# Altium PCB VRAM SIMM TC5262x7J v1.0_PCB_Altium.pcbdoc
Units mm, origin at the board's own origin, x right, y up, seen from the top; angles counter-clockwise.
Board outline 128.52 x 48.51 mm, 2 copper layers (Top Layer, Bottom Layer); 5 components, 55 nets, 290 pads, 63 vias.
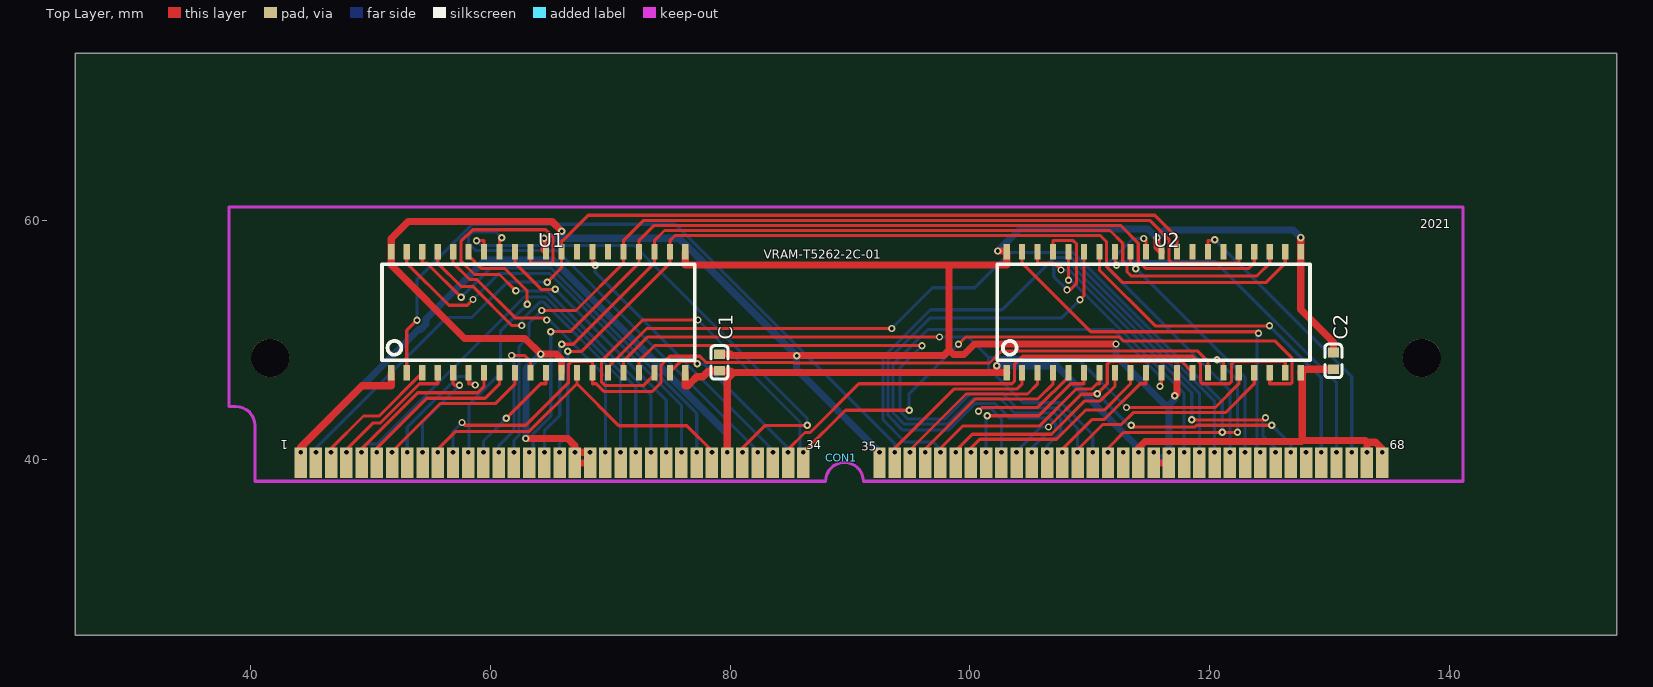
[diagram p0: Top Layer view]
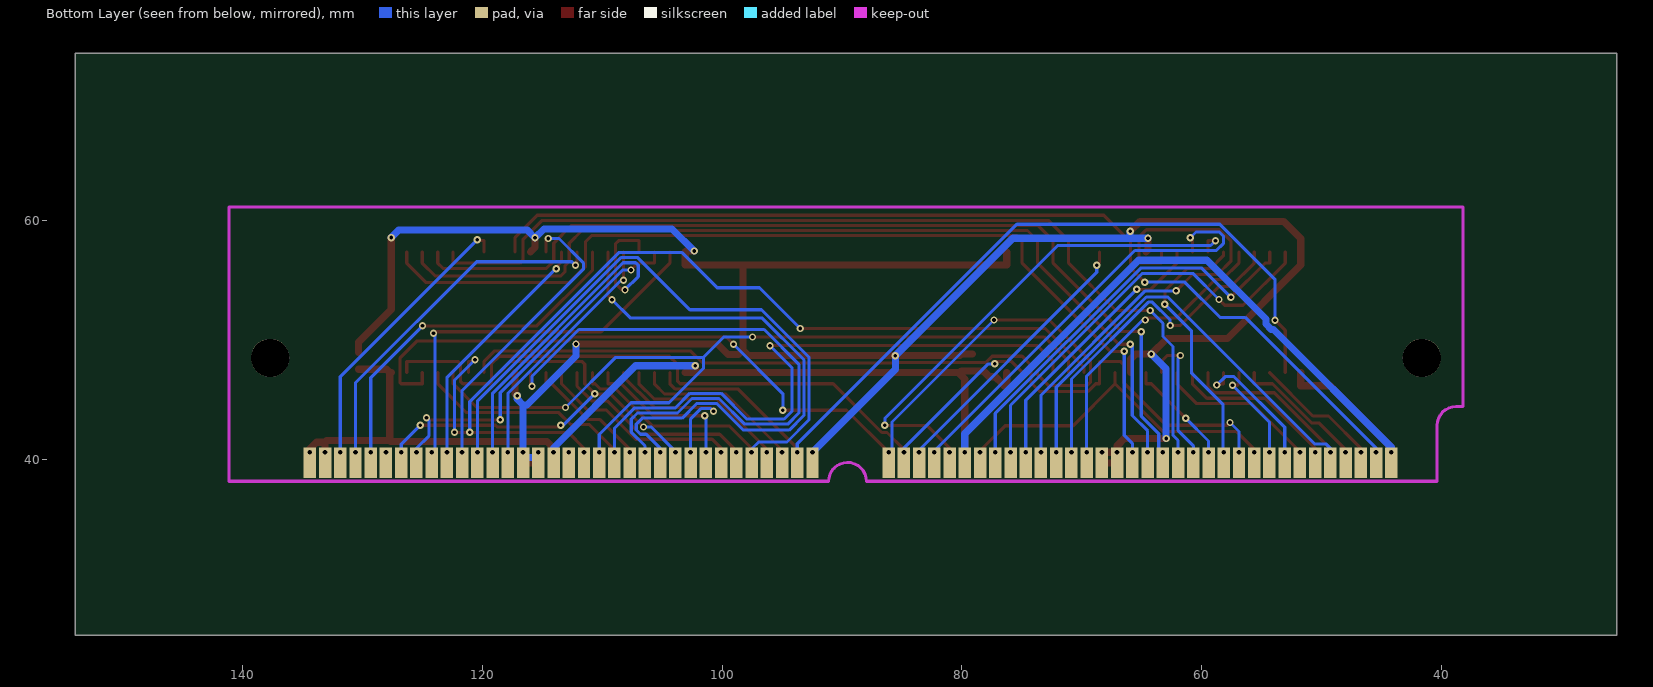
[diagram p1: Bottom Layer view, seen from below]

## Layer stack, top to bottom
Top Layer: signal copper (thickness not stored)
Dielectric: dielectric 0.32, FR-4, Dk 4.8
Bottom Layer: signal copper (thickness not stored)

## Board outline
153.924,25.4 25.4,25.4 25.4,73.914 153.924,73.914

## Components (designator, comment, footprint, x,y, rotation, side; value= is the part's Value field where it differs from the comment)
C1 "1uF" C0603 79.121,48.133 r90 top
C2 "1uF" C0603 130.302,48.26 r90 top
CON1 "SIMM68" SIMM68R 43.688,38.481 r0 top
U1 "TC528267J" SOJ40 64.008,52.451 r0 top
U2 "TC528267J" SOJ40 115.316,52.451 r0 top

## Footprints (in the part's own frame and the unit in brackets; to place one, negate y for a bottom-side part, rotate by r counter-clockwise, add the part's x,y. Pads: shape width x height; smd on the part's side, far side on the other; paste and mask are expansions set on the pad)
C0603 [mm]
  rect 0.8x0.9 smd: 1(-0.7,0) 2(0.7,0)
  silkscreen extent -1.4,-0.7 1.4,0.72
SIMM68R [mil]
  rect 40.94x100 smd: 1(20,50) 2(70,50) 3(120,50) 4(170,50) 5(220,50) 6(270,50) 7(320,50) 8(370,50) 9(420,50) 10(470,50) 11(520,50) 12(570,50) 13(620,50) 14(670,50) 15(720,50) 16(770,50) 17(820,50) 18(870,50) 19(920,50) 20(970,50) 21(1020,50) 22(1070,50) 23(1120,50) 24(1170,50) 25(1220,50) 26(1270,50) 27(1320,50) 28(1370,50) 29(1420,50) 30(1470,50) 31(1520,50) 32(1570,50) 33(1620,50) 34(1670,50) 35(1920,50) 36(1970,50) 37(2020,50) 38(2070,50) 39(2120,50) 40(2170,50) 41(2220,50) 42(2270,50) 43(2320,50) 44(2370,50) 45(2420,50) 46(2470,50) 47(2520,50) 48(2570,50) 49(2620,50) 50(2670,50) 51(2720,50) 52(2770,50) 53(2820,50) 54(2870,50) 55(2920,50) 56(2970,50) 57(3020,50) 58(3070,50) 59(3120,50) 60(3170,50) 61(3220,50) 62(3270,50) 63(3320,50) 64(3370,50) 65(3420,50) 66(3470,50) 67(3520,50) 68(3570,50)
  rect 40.94x100 smd far side: 1(20,50) 2(70,50) 3(120,50) 4(170,50) 5(220,50) 6(270,50) 7(320,50) 8(370,50) 9(420,50) 10(470,50) 11(520,50) 12(570,50) 13(620,50) 14(670,50) 15(720,50) 16(770,50) 17(820,50) 18(870,50) 19(920,50) 20(970,50) 21(1020,50) 22(1070,50) 23(1120,50) 24(1170,50) 25(1220,50) 26(1270,50) 27(1320,50) 28(1370,50) 29(1420,50) 30(1470,50) 31(1520,50) 32(1570,50) 33(1620,50) 34(1670,50) 35(1920,50) 36(1970,50) 37(2020,50) 38(2070,50) 39(2120,50) 40(2170,50) 41(2220,50) 42(2270,50) 43(2320,50) 44(2370,50) 45(2420,50) 46(2470,50) 47(2520,50) 48(2570,50) 49(2620,50) 50(2670,50) 51(2720,50) 52(2770,50) 53(2820,50) 54(2870,50) 55(2920,50) 56(2970,50) 57(3020,50) 58(3070,50) 59(3120,50) 60(3170,50) 61(3220,50) 62(3270,50) 63(3320,50) 64(3370,50) 65(3420,50) 66(3470,50) 67(3520,50) 68(3570,50)
  round 19.68 hole 15.75: 1(20,85) 2(70,85) 3(120,85) 4(170,85) 5(220,85) 6(270,85) 7(320,85) 8(370,85) 9(420,85) 10(470,85) 11(520,85) 12(570,85) 13(620,85) 14(670,85) 15(720,85) 16(770,85) 17(820,85) 18(870,85) 19(920,85) 20(970,85) 21(1020,85) 22(1070,85) 23(1120,85) 24(1170,85) 25(1220,85) 26(1270,85) 27(1320,85) 28(1370,85) 29(1420,85) 30(1470,85) 31(1520,85) 32(1570,85) 33(1620,85) 34(1670,85) 35(1920,85) 36(1970,85) 37(2020,85) 38(2070,85) 39(2120,85) 40(2170,85) 41(2220,85) 42(2270,85) 43(2320,85) 44(2370,85) 45(2420,85) 46(2470,85) 47(2520,85) 48(2570,85) 49(2620,85) 50(2670,85) 51(2720,85) 52(2770,85) 53(2820,85) 54(2870,85) 55(2920,85) 56(2970,85) 57(3020,85) 58(3070,85) 59(3120,85) 60(3170,85) 61(3220,85) 62(3270,85) 63(3320,85) 64(3370,85) 65(3420,85) 66(3470,85) 67(3520,85) 68(3570,85)
SOJ40 [mil]
  rect 20.3x50.8 smd: 1(-482.6,-203.2) 2(-431.8,-203.2) 3(-381,-203.2) 4(-330.2,-203.2) 5(-279.4,-203.2) 6(-228.6,-203.2) 7(-177.8,-203.2) 8(-127,-203.2) 9(-76.2,-203.2) 10(-25.4,-203.2) 11(25.4,-203.2) 12(76.2,-203.2) 13(127,-203.2) 14(177.8,-203.2) 15(228.6,-203.2) 16(279.4,-203.2) 17(330.2,-203.2) 18(381,-203.2) 19(431.8,-203.2) 20(482.6,-203.2) 21(482.6,193) 22(431.8,193) 23(381,193) 24(330.2,193) 25(279.4,193) 26(228.6,193) 27(177.8,193) 28(127,193) 29(76.2,193) 30(25.4,193) 31(-25.4,193) 32(-76.2,193) 33(-127,193) 34(-177.8,193) 35(-228.6,193) 36(-279.4,193) 37(-330.2,193) 38(-381,193) 39(-431.8,193) 40(-482.6,193)
  silkscreen extent -513,-163 513,152

## Free pads (board coordinates)
  round 3.18 hole 3.18 unplated: ""(41.656,48.514) ""(137.668,48.514)

## Via types
v1: diameter 0.61, hole 0.31, Top Layer to Bottom Layer, 63 vias

## Nets (pads, with @x,y where several pads share a name; then routed paths per layer and width w, separated by ;. In a path a pad name is that pad's centre, name@x,y a point inside that pad or via, vN(x,y) a via of type N, cw(c..) or ccw(c..) an arc to the next point about the centre after c; other vN are vias at no path point)
/CAS_A: CON1.32 U1.27 | length 24.8
  Top Layer w0.26: U1.27 68.524,56.416 68.572,56.416 v1(68.758,56.231) ; CON1.32@83.566,39.751 CON1.32@83.566,40.64
  Bottom Layer w0.26: v1(68.758,56.231) 68.758,55.644 83.566,40.836 83.566,40.64 CON1.32@83.566,39.751
/CAS_B: CON1.66 U2.27 | length 25.8
  Top Layer w0.26: U2.27 119.832,58.29 120.32,58.29 v1(120.399,58.369) ; CON1.66@131.826,39.751 CON1.66@131.826,40.64
  Bottom Layer w0.26: v1(120.399,58.369) 131.826,46.942 131.826,40.64 CON1.66@131.826,39.751
/DT/OE_1: CON1.5 CON1.23 U1.7 | length 54.3
  Top Layer w0.26: CON1.5@49.276,39.751 49.276,40.64 49.276,40.924 53.957,45.606 58.958,45.606 59.492,46.139 59.492,46.352 59.492,47.175 U1.7 ; CON1.23@72.136,39.751 CON1.23@72.136,40.64
  Bottom Layer w0.26: CON1.5@49.276,39.751 49.276,40.64 49.276,40.978 49.614,41.318 50.561,41.318 62.832,53.589 64.623,53.589 72.136,46.076 72.136,40.64 CON1.23@72.136,39.751
/DT/OE_3: CON1.39 CON1.57 U2.7 | length 71.9
  Top Layer w0.26: CON1.39@97.536,39.751 97.536,40.64 97.536,40.978 99.38,42.822 105.778,42.822 108.885,45.928 110.17,45.928 110.592,46.352 110.8,46.352 U2.7 ; CON1.57@120.396,39.751 CON1.57@120.396,40.64
  Bottom Layer w0.26: CON1.39@97.536,39.751 97.536,40.64 97.536,40.914 96.944,41.506 94.585,41.506 92.743,43.345 92.743,48.565 96.703,52.525 102.682,52.525 107.023,56.868 108.433,56.868 120.396,44.902 120.396,40.64 CON1.57@120.396,39.751
/RAS: CON1.11 U1.14 U2.14 | length 76.1
  Top Layer w0.26: CON1.11@56.896,39.751 CON1.11@56.896,40.64 ; v1(57.648,43.122) 57.876,42.893 62.956,42.893 66.535,46.474 66.535,47.968 66.794,48.227 68.524,48.227 U1.14 68.524,46.926 68.524,46.352 68.837,46.352 69.472,45.717 73.525,45.717 74.237,46.429 74.237,47.909 74.976,48.651 77.475,48.651 77.998,48.125 85.263,48.125 85.301,48.087 101.623,48.087 102.608,49.073 118.986,49.073 119.832,48.227 U2.14
  Bottom Layer w0.26: CON1.11@56.896,39.751 56.896,40.64 56.896,42.37 v1(57.648,43.122)
/SE_A: CON1.12 U1.35 | length 23.7
  Top Layer w0.26: CON1.12@58.166,39.751 CON1.12@58.166,40.64 ; U1.35 58.202,57.028 59.266,55.964 61.206,55.964 63.081,54.092 v1(63.081,52.992)
  Bottom Layer w0.26: CON1.12@58.166,39.751 58.166,40.64 58.245,40.719 58.245,44.648 60.863,47.264 60.863,50.775 v1(63.081,52.992)
/SE_B: CON1.45 U2.35 | length 48.2
  Top Layer w0.26: CON1.45@105.156,39.751 CON1.45@105.156,40.64 ; v1(109.169,53.365) 109.51,53.706 U2.35
  Bottom Layer w0.26: CON1.45@105.156,39.751 105.156,40.64 105.156,40.978 106.329,42.149 106.797,42.149 107.147,42.499 107.147,42.995 106.647,43.495 103.325,43.495 102.113,44.707 100.424,44.707 98.201,42.487 94.399,42.487 93.167,43.718 93.167,48.346 96.675,51.854 107.658,51.854 v1(109.169,53.365)
/WB/WE_2: CON1.10 CON1.28 U1.13 | length 32.3
  Top Layer w0.26: CON1.10@55.626,39.751 55.626,40.64 55.626,40.881 57.13,42.385 63.266,42.385 67.234,46.352 ; U1.13 67.234,46.352 ; CON1.28@78.486,39.751 78.486,40.64 78.486,40.77 76.396,42.86 70.726,42.86 67.234,46.352
  Bottom Layer w0.26: CON1.10@55.626,39.751 CON1.10@55.626,40.64 ; CON1.28@78.486,39.751 CON1.28@78.486,40.64
/WB/WE_4: CON1.44 CON1.62 U2.13 | length 41.5
  Top Layer w0.26: CON1.44@103.886,39.751 CON1.44@103.886,40.64 ; v1(106.548,42.748) 109.281,45.481 110.566,45.481 v1(110.612,45.527) 111.445,46.36 111.445,47.988 111.686,48.227 117.632,48.227 118.542,47.318 U2.13 ; v1(113.444,42.901) 113.591,42.751 118.74,42.751 118.887,42.901 v1(125.166,42.901) ; CON1.62@126.746,39.751 CON1.62@126.746,40.64
  Bottom Layer w0.26: CON1.44@103.886,39.751 103.886,40.64 103.886,40.742 105.893,42.748 v1(106.548,42.748) ; v1(110.612,45.527) 113.238,42.901 v1(113.444,42.901) ; v1(125.166,42.901) 126.746,41.321 126.746,40.64 CON1.62@126.746,39.751
A0: CON1.15 U1.25 U2.25 | length 80.3
  Top Layer w0.26: CON1.15@61.976,39.751 CON1.15@61.976,40.64 ; v1(64.305,52.464) 67.155,52.464 71.105,56.416 U1.25 71.105,57.821 71.105,58.29 72.796,59.982 114.991,59.982 116.606,58.367 116.606,56.642 116.832,56.416 122.413,56.416 U2.25
  Bottom Layer w0.26: CON1.15@61.976,39.751 61.976,40.64 61.976,41.638 62.4,42.06 62.4,49.464 63.233,50.297 63.233,51.394 v1(64.305,52.464)
A1: CON1.16 U1.24 U2.24 | length 79.5
  Top Layer w0.26: CON1.16@63.246,39.751 CON1.16@63.246,40.64 ; v1(65.047,50.698) 66.678,50.698 72.395,56.416 U1.24 72.395,58.29 73.665,59.56 112.545,59.56 114.026,58.077 114.026,56.584 114.63,55.979 123.266,55.979 123.703,56.416 U2.24
  Bottom Layer w0.26: CON1.16@63.246,39.751 63.246,40.64 63.584,40.978 63.584,42.197 65.047,43.66 v1(65.047,50.698)
A2: CON1.17 U1.23 U2.23 | length 79.6
  Top Layer w0.26: CON1.17@64.516,39.751 CON1.17@64.516,40.64 ; v1(65.969,49.654) 66.924,49.654 73.685,56.416 U1.23 73.685,58.29 74.531,59.136 111.674,59.136 112.735,58.075 112.735,56.553 113.093,56.195 113.093,55.687 113.441,55.336 123.914,55.336 124.993,56.416 U2.23
  Bottom Layer w0.26: CON1.17@64.516,39.751 64.516,40.64 64.516,42.431 65.794,43.708 65.794,49.482 v1(65.969,49.654)
A3: CON1.18 U1.22 U2.22 | length 79.8
  Top Layer w0.26: CON1.18@65.786,39.751 CON1.18@65.786,40.64 ; v1(66.462,49.055) 67.617,49.055 74.976,56.416 U1.22 74.976,58.29 75.4,58.715 110.871,58.715 111.369,58.214 111.369,56.147 112.723,54.79 124.661,54.79 126.284,56.416 U2.22
  Bottom Layer w0.26: CON1.18@65.786,39.751 65.786,40.64 65.786,41.382 66.462,42.057 v1(66.462,49.055)
A4: CON1.33 U1.19 U2.19 | length 65.5
  Top Layer w0.26: U1.19 74.976,47.318 75.885,48.227 77.053,48.227 v1(77.262,48.019) ; CON1.33@84.836,39.751 84.836,40.64 84.836,40.891 86.238,42.294 86.675,42.294 90.734,46.352 103.502,46.352 103.703,46.553 103.703,47.96 104.391,48.651 118.582,48.651 119.225,48.009 119.225,46.487 119.357,46.352 121.608,46.352 121.813,46.558 121.813,48.009 122.034,48.227 126.284,48.227 U2.19
  Bottom Layer w0.26: v1(77.262,48.019) 77.795,48.019 84.836,40.978 84.836,40.64 CON1.33@84.836,39.751
A5: CON1.34 U1.18 U2.18 | length 83.9
  Top Layer w0.26: U1.18 73.685,47.099 72.812,46.225 69.56,46.225 69.263,46.523 69.263,48.227 72.71,51.671 v1(77.32,51.671) ; CON1.34@86.106,39.751 86.106,40.64 89.619,44.15 v1(94.925,44.15) ; v1(99.047,49.652) 99.662,50.269 112.418,50.269 112.753,49.934 125.418,49.934 126.835,48.517 126.835,46.429 126.759,46.352 124.993,46.352 U2.18
  Bottom Layer w0.26: v1(77.32,51.671) 85.829,43.162 85.829,40.917 86.106,40.64 CON1.34@86.106,39.751 ; v1(94.925,44.15) 94.925,45.529 v1(99.047,49.652)
A6: CON1.48 U1.17 U2.17 | length 70.4
  Top Layer w0.26: U1.17 72.395,48.227 73.698,49.53 v1(95.994,49.53) ; CON1.48@108.966,39.751 108.966,40.64 108.966,40.864 111.064,42.962 112.616,42.962 113.602,43.947 121.298,43.947 123.703,46.352 123.703,46.82 U2.17
  Bottom Layer w0.26: v1(95.994,49.53) 94.165,47.701 94.165,44.066 94.816,43.414 97.935,43.414 100.073,45.552 102.674,45.552 103.881,44.346 107.277,44.346 108.966,42.657 108.966,40.64 CON1.48@108.966,39.751
A7: CON1.49 U1.16 U2.16 | length 72.4
  Top Layer w0.26: U1.16 71.105,48.227 73.139,50.262 v1(97.457,50.262) ; CON1.49@110.236,39.751 CON1.49@110.236,40.64 ; v1(113.05,44.374) 120.434,44.374 122.413,46.352 U2.16
  Bottom Layer w0.26: v1(97.457,50.262) 99.835,50.262 101.539,48.56 ; CON1.49@110.236,39.751 110.236,40.64 110.236,42.121 107.587,44.77 104.419,44.77 101.539,47.65 101.539,48.56 ; v1(113.05,44.374) 108.864,48.56 101.539,48.56
A8: CON1.50 U1.15 U2.15 | length 85.1
  Top Layer w0.26: U1.15 69.814,47.734 73.048,50.968 v1(93.475,50.968) ; CON1.50@111.506,39.751 111.506,40.64 111.506,40.978 112.832,42.304 v1(121.031,42.304) v1(122.301,42.304) ; v1(120.594,48.362) 120.729,48.227 121.122,48.227 U2.15
  Bottom Layer w0.26: v1(93.475,50.968) 96.868,54.364 100.393,54.364 103.322,57.29 108.608,57.29 121.031,44.867 v1(121.031,42.304) ; CON1.50@111.506,39.751 CON1.50@111.506,40.64 ; v1(120.594,48.362) 122.301,46.655 v1(122.301,42.304)
DSF: CON1.2 U1.29 U2.29 | length 85.3
  Top Layer w0.26: CON1.2@45.466,39.751 CON1.2@45.466,40.64 ; v1(64.747,54.828) 65.943,56.025 U1.29 65.943,57.729 65.943,58.29 66.05,58.29 68.163,60.406 115.413,60.406 117.251,58.565 117.251,58.29 U2.29
  Bottom Layer w0.26: CON1.2@45.466,39.751 45.466,40.64 45.466,40.978 56.383,51.895 58.486,51.895 61.42,54.828 v1(64.747,54.828)
GND: C1.2 C2.2 CON1.19 CON1.20 CON1.35 CON1.53 CON1.54 U1.12 U1.21 U1.30 U1.40 U2.12 U2.21 U2.30 U2.40 | length 222
  Top Layer w0.6: v1(62.972,41.786) 66.464,41.786 67.056,41.194 67.056,40.64 68.326,40.64 68.326,39.751 CON1.19@67.056,39.751 ; v1(64.483,58.481) 64.483,57.523 U1.30 ; U1.12 65.943,47.843 65.943,48.395 65.509,48.829 v1(64.206,48.829) 62.903,50.132 57.864,50.132 51.75,56.248 51.75,56.799 U1.40 51.75,58.458 53.188,59.896 65.138,59.896 v1(65.974,59.06) ; U1.21 76.266,56.248 98.257,56.248 ; C1.2 80.03,48.834 80.147,48.717 v1@85.547,48.717 ; v1(85.547,48.684) v1@85.547,48.717 ; CON1.35@92.456,39.751 CON1.35@92.456,40.64 ; v1(102.314,57.417) 102.994,57.417 U2.40 103.058,56.248 98.257,56.248 ; v1(112.171,49.67) 100.378,49.67 99.499,48.791 98.626,48.791 98.257,49.162 ; CON1.53@115.316,39.751 116.586,39.751 CON1.54@116.586,40.64 ; v1(115.59,58.519) 115.59,57.724 U2.30 ; v1(117.079,45.352) 117.251,45.527 U2.12 ; v1(127.574,58.542) U2.21 127.574,52.548 130.302,49.82 C2.2 ; v1@85.547,48.717 97.813,48.717 98.257,49.162 ; 98.257,49.162 98.257,56.248
  Bottom Layer w0.6: v1(62.972,41.786) 62.992,41.806 62.992,47.615 v1(64.206,48.829) ; v1(64.483,58.481) 65.974,58.481 ; v1(65.974,59.06) 65.974,58.481 ; CON1.19@67.056,39.751 CON1.19@67.056,40.64 ; CON1.20@68.326,39.751 CON1.20@68.326,40.64 ; CON1.35@92.456,39.751 92.456,40.64 85.547,47.549 v1(85.547,48.684) 75.75,58.481 65.974,58.481 ; v1(102.314,57.417) 104.163,59.263 114.844,59.263 v1(115.59,58.519) 116.238,59.167 126.949,59.167 v1(127.574,58.542) ; v1(112.171,49.67) 112.171,48.664 116.251,44.582 116.586,44.582 ; CON1.53@115.316,39.751 CON1.53@115.316,40.195 ; CON1.53@115.316,40.64 CON1.53@115.316,40.195 ; CON1.54@116.586,39.751 CON1.54@116.586,40.195 ; v1(117.079,45.352) 117.079,45.075 116.586,44.582 ; CON1.53@115.316,40.195 CON1.54@116.586,40.195 ; CON1.54@116.586,40.195 116.586,40.64 116.586,44.582
I/O1_A: CON1.6 U1.8 | length 15.5
  Top Layer w0.26: CON1.6@50.546,39.751 50.546,40.64 50.546,40.988 54.704,45.148 59.578,45.148 60.782,46.352 U1.8
  Bottom Layer w0.26: CON1.6@50.546,39.751 CON1.6@50.546,40.64
I/O1_B: CON1.40 U2.8 | length 18.5
  Top Layer w0.26: CON1.40@98.806,39.751 98.806,40.64 98.806,40.757 100.198,42.149 106.797,42.149 109.576,44.93 110.861,44.93 112.09,46.159 112.09,46.352 U2.8
  Bottom Layer w0.26: CON1.40@98.806,39.751 CON1.40@98.806,40.64
I/O2_A: CON1.7 U1.9 | length 15.4
  Top Layer w0.26: CON1.7@51.816,39.751 51.816,40.64 51.816,40.698 55.816,44.696 60.419,44.696 62.073,46.352 U1.9
  Bottom Layer w0.26: CON1.7@51.816,39.751 CON1.7@51.816,40.64
I/O2_B: CON1.41 U2.9 | length 18.6
  Top Layer w0.26: CON1.41@100.076,39.751 100.076,40.64 100.076,40.978 100.825,41.727 107.206,41.727 109.634,44.158 111.186,44.158 113.381,46.352 U2.9
  Bottom Layer w0.26: CON1.41@100.076,39.751 CON1.41@100.076,40.64
I/O3_A: CON1.14 U1.10 | length 13.2
  Top Layer w0.26: CON1.14@60.706,39.751 CON1.14@60.706,40.64 ; v1(61.783,48.71) 62.88,48.71 63.363,48.227 U1.10
  Bottom Layer w0.26: CON1.14@60.706,39.751 60.706,40.64 60.706,41.176 61.976,42.446 61.976,48.517 v1(61.783,48.71)
I/O3_B: CON1.47 U2.10 | length 12.2
  Top Layer w0.26: CON1.47@107.696,39.751 107.696,40.64 107.696,40.884 110.198,43.386 111.216,43.386 114.183,46.352 114.671,46.352 U2.10
  Bottom Layer w0.26: CON1.47@107.696,39.751 CON1.47@107.696,40.64
I/O4_A: CON1.13 U1.11 | length 10.9
  Top Layer w0.26: CON1.13@59.436,39.751 CON1.13@59.436,40.64 ; v1(61.341,43.49) 64.204,46.352 64.653,46.352 U1.11
  Bottom Layer w0.26: CON1.13@59.436,39.751 59.436,40.64 59.436,41.585 v1(61.341,43.49)
I/O4_B: CON1.46 U2.11 | length 52.1
  Top Layer w0.26: CON1.46@106.426,39.751 CON1.46@106.426,40.64 ; v1(115.839,46.159) 115.961,46.284 U2.11
  Bottom Layer w0.26: CON1.46@106.426,39.751 106.426,40.64 106.426,41.181 107.569,42.324 107.569,43.404 107.051,43.922 103.708,43.922 102.499,45.131 100.249,45.131 98.108,42.989 94.513,42.989 93.589,43.914 93.589,47.97 96.492,50.874 111.935,50.874 115.839,46.97 v1(115.839,46.159)
I/O5_A: CON1.24 U1.31 | length 41.9
  Top Layer w0.26: v1(62.141,54.105) 60.777,55.469 58.689,55.469 57.556,56.601 57.556,58.224 58.529,59.197 64.615,59.197 65.245,58.565 65.245,56.589 65.072,56.416 63.363,56.416 U1.31 ; CON1.24@73.406,39.751 CON1.24@73.406,40.64
  Bottom Layer w0.26: v1(62.141,54.105) 64.706,54.105 73.406,45.405 73.406,40.64 CON1.24@73.406,39.751
I/O5_B: CON1.58 U2.31 | length 26.7
  Top Layer w0.26: v1(114.485,58.471) 114.666,58.29 114.671,58.29 U2.31 ; CON1.58@121.666,39.751 CON1.58@121.666,40.64
  Bottom Layer w0.26: v1(114.485,58.471) 113.594,58.471 111.557,56.434 111.557,55.898 121.666,45.789 121.666,40.64 CON1.58@121.666,39.751
I/O6_A: CON1.25 U1.32 | length 24.4
  Top Layer w0.26: U1.32 62.073,56.416 64.282,54.206 65.377,54.206 v1(65.413,54.244) ; CON1.25@74.676,39.751 CON1.25@74.676,40.64
  Bottom Layer w0.26: v1(65.413,54.244) 74.676,44.981 74.676,40.64 CON1.25@74.676,39.751
I/O6_B: CON1.59 U2.32 | length 22.5
  Top Layer w0.26: U2.32 113.381,56.505 113.815,56.073 v1(113.815,55.933) ; CON1.59@122.936,39.751 CON1.59@122.936,40.64
  Bottom Layer w0.26: v1(113.815,55.933) 113.868,55.933 122.936,46.866 122.936,40.64 CON1.59@122.936,39.751
I/O7_A: CON1.31 U1.33 | length 38.1
  Top Layer w0.26: U1.33 60.782,58.29 60.96,58.468 v1(60.96,58.534) ; CON1.31@82.296,39.751 CON1.31@82.296,40.64
  Bottom Layer w0.26: v1(60.96,58.534) 60.485,59.009 58.532,59.009 58.199,58.677 58.199,58.042 58.781,57.462 65.583,57.462 82.296,40.749 82.296,40.64 CON1.31@82.296,39.751
I/O7_B: CON1.65 U2.33 | length 31.4
  Top Layer w0.26: U2.33 112.09,56.416 112.215,56.291 v1(112.215,56.228) ; CON1.65@130.556,39.751 CON1.65@130.556,40.64
  Bottom Layer w0.26: v1(112.215,56.228) 112.519,56.533 120.459,56.533 130.556,46.436 130.556,40.64 CON1.65@130.556,39.751
I/O8_A: CON1.30 U1.34 | length 44.2
  Top Layer w0.26: v1(58.859,58.29) 59.492,58.29 U1.34 ; CON1.30@81.026,39.751 81.026,40.64 81.026,40.978 82.939,42.89 v1(86.426,42.89)
  Bottom Layer w0.26: v1(58.859,58.29) 59.266,57.884 72.004,57.884 86.426,43.462 v1(86.426,42.89) ; CON1.30@81.026,39.751 CON1.30@81.026,40.64
I/O8_B: CON1.64 U2.34 | length 31.7
  Top Layer w0.26: U2.34 110.8,56.416 110.8,55.816 115.435,51.184 v1(124.963,51.184) ; CON1.64@129.286,39.751 CON1.64@129.286,40.64
  Bottom Layer w0.26: v1(124.963,51.184) 129.286,46.86 129.286,40.64 CON1.64@129.286,39.751
S$68: 
SC: CON1.36 U1.2 U2.2 | length 74
  Top Layer w0.26: U1.2 53.04,50.805 v1(53.889,51.653) ; CON1.36@93.726,39.751 93.726,40.64 93.726,40.978 98.679,45.928 103.927,45.928 104.348,46.352 U2.2
  Bottom Layer w0.26: v1(53.889,51.653) 53.889,55.042 58.506,59.657 75.42,59.657 93.726,41.351 93.726,40.64 CON1.36@93.726,39.751
SI/O1_A: CON1.3 U1.3 | length 12.3
  Top Layer w0.26: CON1.3@46.736,39.751 46.736,40.64 46.736,40.97 49.433,43.668 50.736,43.668 54.331,47.264 U1.3
  Bottom Layer w0.26: CON1.3@46.736,39.751 CON1.3@46.736,40.64
SI/O1_B: CON1.37 U2.3 | length 15.8
  Top Layer w0.26: CON1.37@94.996,39.751 94.996,40.64 94.996,40.831 99.672,45.507 104.793,45.507 105.639,46.352 U2.3
  Bottom Layer w0.26: CON1.37@94.996,39.751 CON1.37@94.996,40.64
SI/O2_A: CON1.4 U1.4 | length 12.8
  Top Layer w0.26: CON1.4@48.006,39.751 48.006,40.64 48.006,40.851 50.251,43.096 50.851,43.096 54.107,46.352 55.621,46.352 U1.4
  Bottom Layer w0.26: CON1.4@48.006,39.751 CON1.4@48.006,40.64
SI/O2_B: CON1.38 U2.4 | length 15.9
  Top Layer w0.26: CON1.38@96.266,39.751 96.266,40.64 96.266,40.917 100.432,45.082 105.661,45.082 106.929,46.352 U2.4
  Bottom Layer w0.26: CON1.38@96.266,39.751 CON1.38@96.266,40.64
SI/O3_A: CON1.9 U1.5 | length 10.2
  Top Layer w0.26: CON1.9@54.356,39.751 CON1.9@54.356,40.64 ; U1.5 56.911,46.352 57.028,46.236 v1(57.434,46.236)
  Bottom Layer w0.26: CON1.9@54.356,39.751 54.356,40.64 54.356,43.157 v1(57.434,46.236)
SI/O3_B: CON1.43 U2.5 | length 16
  Top Layer w0.26: v1(100.708,44.069) 101.026,44.384 105.656,44.384 108.219,46.947 U2.5 ; CON1.43@102.616,39.751 CON1.43@102.616,40.64
  Bottom Layer w0.26: v1(100.708,44.069) 100.927,44.285 101.76,44.285 102.616,43.429 102.616,40.64 CON1.43@102.616,39.751
SI/O4_A: CON1.8 U1.6 | length 13.1
  Top Layer w0.26: CON1.8@53.086,39.751 CON1.8@53.086,40.64 ; U1.6 58.202,46.352 58.656,46.352 v1(58.758,46.251)
  Bottom Layer w0.26: CON1.8@53.086,39.751 53.086,40.64 53.086,42.73 57.31,46.954 58.054,46.954 v1(58.758,46.251)
SI/O4_B: CON1.42 U2.6 | length 15
  Top Layer w0.26: CON1.42@101.346,39.751 CON1.42@101.346,40.64 ; v1(101.445,43.688) 105.745,43.688 108.41,46.352 109.51,46.352 U2.6
  Bottom Layer w0.26: CON1.42@101.346,39.751 101.346,40.64 101.346,43.589 v1(101.445,43.688)
SI/O5_A: CON1.21 U1.36 | length 25.7
  Top Layer w0.26: U1.36 56.911,56.416 58.283,55.044 58.88,55.044 62.075,51.852 64.536,51.852 v1(64.712,51.676) ; CON1.21@69.596,39.751 CON1.21@69.596,40.64
  Bottom Layer w0.26: v1(64.712,51.676) 64.93,51.676 69.596,47.008 69.596,40.64 CON1.21@69.596,39.751
SI/O5_B: CON1.55 U2.36 | length 22.6
  Top Layer w0.26: v1(108.219,54.991) U2.36 ; CON1.55@117.856,39.751 CON1.55@117.856,40.64
  Bottom Layer w0.26: v1(108.219,54.991) 108.417,54.991 117.856,45.55 117.856,40.64 CON1.55@117.856,39.751
SI/O6_A: CON1.22 U1.37 | length 30
  Top Layer w0.26: U1.37 55.621,56.416 57.564,54.473 58.555,54.473 61.821,51.206 v1(62.636,51.206) ; CON1.22@70.866,39.751 CON1.22@70.866,40.64
  Bottom Layer w0.26: v1(62.636,51.206) 62.636,51.671 64.12,53.157 64.458,53.157 70.866,46.749 70.866,40.64 CON1.22@70.866,39.751
SI/O6_B: CON1.56 U2.37 | length 33.3
  Top Layer w0.26: U2.37 106.929,58.29 108.618,58.29 108.864,58.044 108.864,54.686 108.359,54.181 v1(108.095,54.181) ; CON1.56@119.126,39.751 CON1.56@119.126,40.64
  Bottom Layer w0.26: v1(108.095,54.181) 106.987,55.288 106.987,56.233 107.198,56.444 108.257,56.444 119.126,45.575 119.126,40.64 CON1.56@119.126,39.751
SI/O7_A: CON1.27 U1.38 | length 36
  Top Layer w0.26: U1.38 54.331,56.416 54.724,56.416 v1(57.572,53.569) ; CON1.27@77.216,39.751 CON1.27@77.216,40.64
  Bottom Layer w0.26: v1(57.572,53.569) 60.002,55.999 65.1,55.999 77.216,43.884 77.216,40.64 CON1.27@77.216,39.751
SI/O7_B: CON1.61 U2.38 | length 31.9
  Top Layer w0.26: U2.38 105.639,56.416 107.015,56.416 v1(107.584,55.847) ; v1(118.491,43.35) 124.475,43.35 v1(124.643,43.518) ; CON1.61@125.476,39.751 CON1.61@125.476,40.64
  Bottom Layer w0.26: v1(107.584,55.847) 108.255,55.847 118.491,45.611 v1(118.491,43.35) ; v1(124.643,43.518) 124.417,43.292 124.417,42.034 125.476,40.978 125.476,40.64 CON1.61@125.476,39.751
SI/O8_A: CON1.26 U1.39 | length 36.7
  Top Layer w0.26: U1.39 53.04,56.416 56.558,52.898 58.082,52.898 v1(58.567,53.383) ; CON1.26@75.946,39.751 CON1.26@75.946,40.64
  Bottom Layer w0.26: v1(58.567,53.383) 60.744,55.56 64.94,55.56 75.946,44.554 75.946,40.64 CON1.26@75.946,39.751
SI/O8_B: CON1.60 U2.39 | length 34.9
  Top Layer w0.26: U2.39 104.348,56.416 110.073,50.691 123.932,50.691 v1(124.051,50.571) ; CON1.60@124.206,39.751 CON1.60@124.206,40.64
  Bottom Layer w0.26: v1(124.051,50.571) 123.916,50.439 123.916,40.93 124.206,40.64 CON1.60@124.206,39.751
VCC: C1.1 C2.1 CON1.1 CON1.29 CON1.52 CON1.67 CON1.68 U1.1 U1.20 U2.1 U2.20 | length 152.1
  Top Layer w0.6: CON1.1@44.196,39.751 44.196,40.64 44.196,41.062 49.319,46.185 51.75,46.185 U1.1 ; U1.20 76.266,46.185 76.469,46.185 76.644,46.36 76.644,46.38 77.211,46.944 77.721,46.944 78.212,47.432 C1.1 80.03,47.432 80.239,47.226 ; CON1.29@79.756,39.751 79.756,40.64 79.756,46.744 80.239,47.226 ; v1(102.23,47.851) 102.23,47.29 ; U2.1 102.23,47.29 ; CON1.52@114.046,39.751 114.046,40.64 114.046,40.998 114.584,41.537 127.627,41.537 127.709,41.618 ; U2.20 U2.20@127.709,47.29 ; C2.1 127.98,47.559 U2.20@127.709,47.29 ; CON1.67@133.096,39.751 133.096,40.64 133.096,41.481 ; CON1.68@134.366,39.751 134.366,40.64 134.366,40.924 133.81,41.481 133.096,41.481 ; 80.239,47.226 80.302,47.29 102.23,47.29 ; 127.709,41.618 132.959,41.618 133.096,41.481 ; 127.709,41.618 U2.20@127.709,47.29
  Bottom Layer w0.6: CON1.1@44.196,39.751 44.196,40.64 44.196,41.062 54.021,50.886 54.206,50.886 54.656,51.336 54.656,51.758 59.555,56.66 65.278,56.66 79.756,42.182 79.756,40.64 CON1.29@79.756,39.751 ; v1(102.23,47.851) 107.203,47.851 114.046,41.008 114.046,40.64 CON1.52@114.046,39.751 ; CON1.67@133.096,39.751 CON1.67@133.096,40.64 ; CON1.68@134.366,39.751 CON1.68@134.366,40.64
pads on no net: CON1.51 CON1.63 U1.26 U1.28 U2.26 U2.28

## Silkscreen, mask and mechanical layers (free items; w line width, h text height)
Top Overlay:
  text "2021" at 137.541,59.319 h0.74
  text "VRAM-T5262-2C-01" at 82.804,56.779 h0.74
  text "1" at 43.18,41.646 h0.74 r180
  text "34" at 86.36,40.904 h0.74
  text "68" at 135.001,40.904 h0.74
  text "35" at 90.932,40.777 h0.74
Document:
  lines w0.003: 89.637,49.632 89.687,49.682